# EAGLE board Sturingsschakeling_PCB_v3.1 (EAGLE 9.7.0)
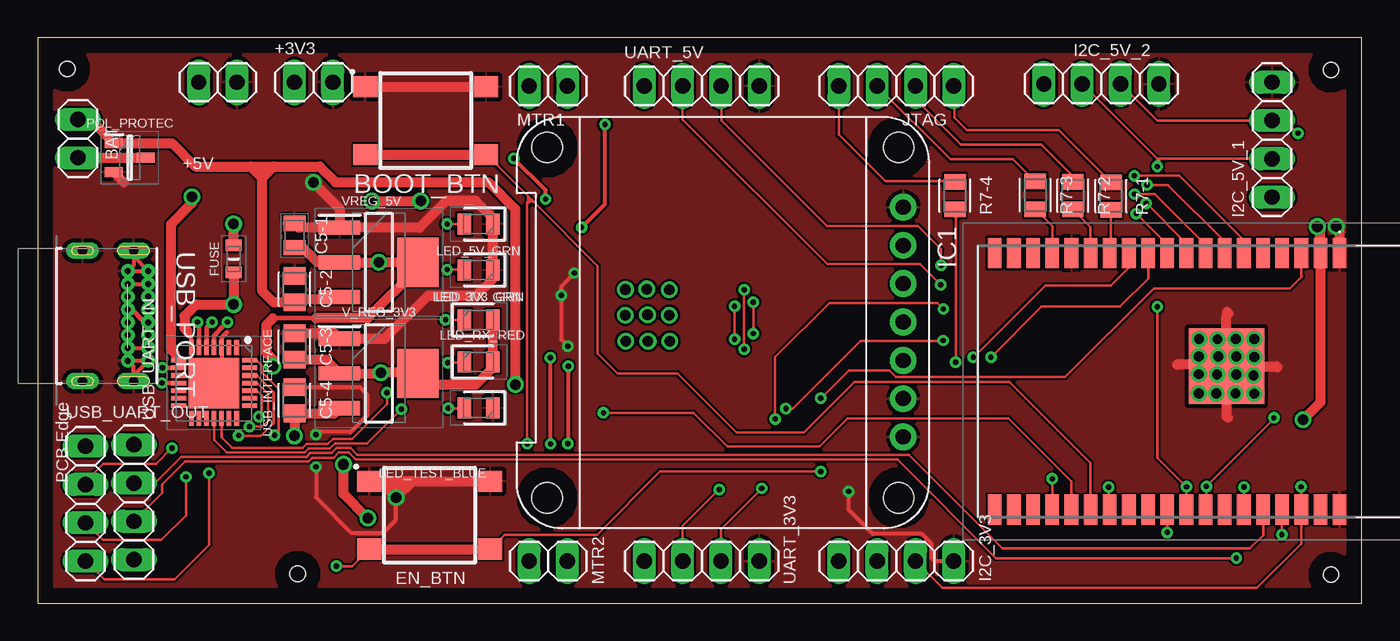
[diagram p0: board, top side]
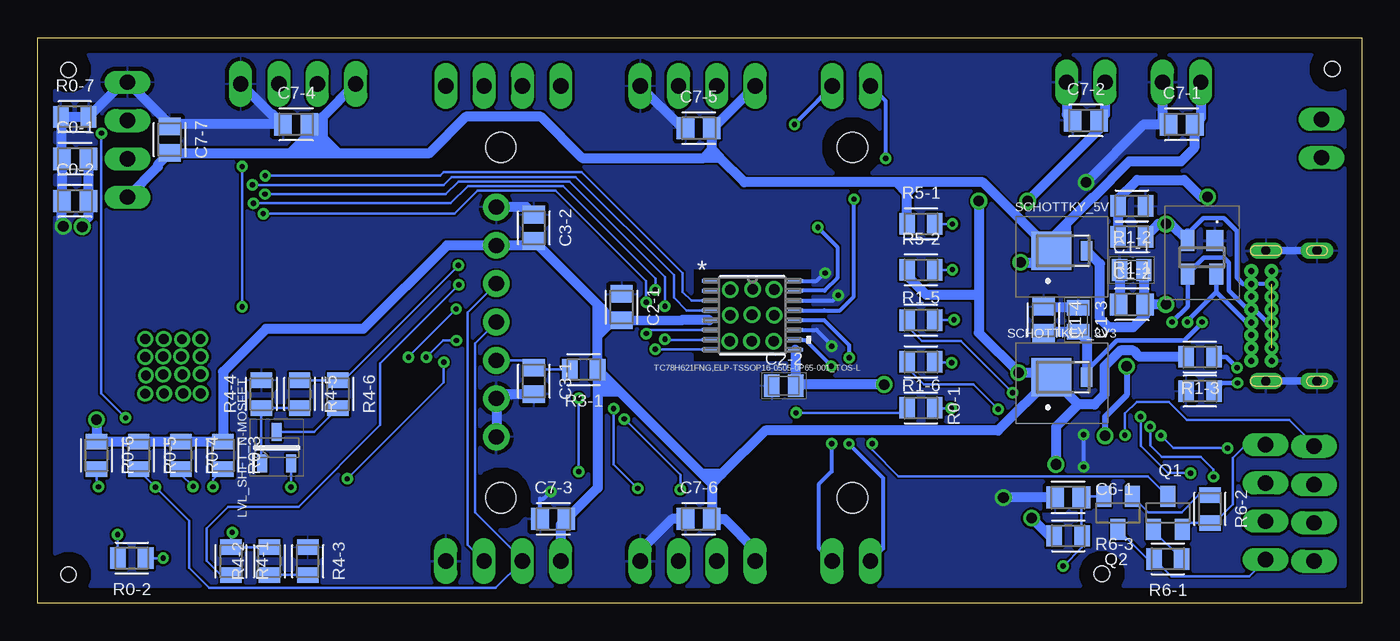
[diagram p1: board, bottom side, seen from below]

Size 87.74 x 37.5 mm. Coordinates in mm from the lower left corner, seen from the top.
Outline: 0,0 87.74,0 87.74,37.5 0,37.5 0,0
Copper layers (1*16): Top 0.035mm / dielectric 1.5mm / Bottom 0.035mm
Design rules "default": minimum track width 6mil, minimum drill 0.35mm, track to track 6mil, track to pad 6mil, pad to pad 6mil, via to via 6mil, smd to smd 6mil, copper to edge 40mil, drill to drill 6mil, minimum pad ring 10mil, minimum via ring 8mil, stop-mask expansion 4mil, vias tented up to drill 0mil, thermal gap 10mil
Holes 1 mm at 85.7,1.91 85.7,35.37 1.96,35.42 17.22,1.96

## Footprints (pad centres in the part's own frame; a part is rotated, then mirrored left to right if it is on the bottom)
1X02 = drill 1.016 long: 1 -1.27,0; 2 1.27,0
B3FS-1000P = smd 1.6 x 1.4: 1 4,-2.25; 2 -4,-2.25; 3 4,2.25; 4 -4,2.25
CAPC2012X110 = smd 1.165 x 1.465: 1 -0.875,0; 2 0.875,0
CAPC2012X145N = smd 1.02 x 1.47: 1 -0.8,0; 2 0.8,0
FUSC1608X100N = smd 0.77 x 1.07: 1 -0.9,0; 2 0.9,0
1X04 = drill 1.016 long: 1 -3.81,0; 2 -1.27,0; 3 1.27,0; 4 3.81,0
ESP32WROVER = smd 2 x 0.9: 1 -8.5,8.26; 2 -8.5,6.99; 3 -8.5,5.72; 4 -8.5,4.45; 5 -8.5,3.18; 6 -8.5,1.91; 7 -8.5,0.64; 8 -8.5,-0.63; 9 -8.5,-1.9; 10 -8.5,-3.17; 11 -8.5,-4.44; 12 -8.5,-5.71; 13 -8.5,-6.98; 14 -8.5,-8.25; 15 -8.5,-9.52; 16 -8.5,-10.79; 17 -8.5,-12.06; 18 -8.5,-13.33; 19 -8.5,-14.6; 20 8.5,-14.6; 21 8.5,-13.33; 22 8.5,-12.06; 23 8.5,-10.79; 24 8.5,-9.52; 25 8.5,-8.25; 26 8.5,-6.98; 27 8.5,-5.71; 28 8.5,-4.44; 29 8.5,-3.17; 30 8.5,-1.9; 31 8.5,-0.63; 32 8.5,0.64; 33 8.5,1.91; 34 8.5,3.18; 35 8.5,4.45; 36 8.5,5.72; 37 8.5,6.99; 38 8.5,8.26 | smd 5 x 5: 39 -1,0.76
LEDC2012X80N = smd 0.9 x 1.4: 1 -0.95,0; 2 0.95,0
SOT96P240X110-3N = smd 1.2 x 0.65: 1 -1.05,0.96; 2 -1.05,-0.96; 3 1.05,0
P-TSSOP16-0505-0P65-001_TOS-L = smd 1.006 x 0.23: 1 -2.849,2.275; 2 -2.849,1.625; 3 -2.849,0.975; 4 -2.849,0.325; 5 -2.849,-0.325; 6 -2.849,-0.975; 7 -2.849,-1.625; 8 -2.849,-2.275; 9 2.849,-2.275; 10 2.849,-1.625; 11 2.849,-0.975; 12 2.849,-0.325; 13 2.849,0.325; 14 2.849,0.975; 15 2.849,1.625; 16 2.849,2.275
OLED096_SPI/I2C = drill 1 pad 1.778: CS/GND 22.5,26.87; D0/SCL 12.34,26.87; D1/SDA 14.88,26.87; DC/GND 19.96,26.87; GND 7.26,26.87; RES/RST 17.42,26.87; VCC 9.8,26.87 | hole 2: 3.3,3.27; 26.54,3.27; 26.54,26.57; 3.3,26.57
SOT23-BEC = smd 1 x 1.4: B -0.95,-1.1; C 0,1.1; E 0.95,-1.1
RESC2012X65 = smd 1.031 x 1.42: 1 -0.919,0; 2 0.919,0
SS1P3LM384A = smd 2.67 x 2.54: 1 0,0 | smd 0.762 x 1.27: 2 2.351,0
SP0503BAHTG = smd 1.1 x 1.4: 1 -0.85,-1.1 | smd 0.9 x 1.4: 2 0.95,-1.1; 3 0.95,1.1; 4 -0.95,1.1
QFN50P500X500X80-29N = smd 1 x 0.3: 1 -2.35,1.5; 2 -2.35,1; 3 -2.35,0.5; 4 -2.35,0; 5 -2.35,-0.5; 6 -2.35,-1; 7 -2.35,-1.5; 15 2.35,-1.5; 16 2.35,-1; 17 2.35,-0.5; 18 2.35,0; 19 2.35,0.5; 20 2.35,1; 21 2.35,1.5 | smd 0.3 x 1: 8 -1.5,-2.35; 9 -1,-2.35; 10 -0.5,-2.35; 11 0,-2.35; 12 0.5,-2.35; 13 1,-2.35; 14 1.5,-2.35; 22 1.5,2.35; 23 1,2.35; 24 0.5,2.35; 25 0,2.35; 26 -0.5,2.35; 27 -1,2.35; 28 -1.5,2.35 | smd 3.35 x 3.35: 29 0,0
GCT_USB4085-GF-A_REVA4 = drill 0.4 pad 0.65: A1 -2.975,4.025; A4 -2.125,4.025; A5 -1.275,4.025; A6 -0.425,4.025; A7 0.425,4.025; A8 1.275,4.025; A9 2.125,4.025; A12 2.975,4.025; B1 2.975,2.675; B4 2.125,2.675; B5 1.275,2.675; B6 0.425,2.675; B7 -0.425,2.675; B8 -1.275,2.675; B9 -2.125,2.675; B12 -2.975,2.675 | drill 0.6 pad 1.108 long: P1 -4.325,3.045; P2 4.325,3.045; P3 4.325,-0.335; P4 -4.325,-0.335
SOT230P700X180-4N = smd 2.75 x 0.95: 1 -2.6,2.3; 2 -2.6,0; 3 -2.6,-2.3 | smd 2.75 x 3.25: 4 2.6,0

## Placement (x,y rotation side)
+3V3  PINHD-1X2  [1X02]  18.29,34.54 0 top
+5V  PINHD-1X2  [1X02]  11.94,34.54 0 top
BAT  PINHD-1X2  [1X02]  2.67,30.81 270 top
BOOT_BTN  B3FS-1000P  [B3FS-1000P]  25.72,32 180 top
C0-1  22uF  [CAPC2012X110]  85.27,29.46 0 bottom
C0-2  100nF  [CAPC2012X110]  85.27,26.67 0 bottom
C1-1  4.7uF_16V  [CAPC2012X145N]  15.24,22.1 0 bottom
C1-2  100nF  [CAPC2012X110]  15.24,19.81 0 bottom
C1-3  4.7uF_16V  [CAPC2012X145N]  18.8,18.8 270 bottom
C1-4  100nF  [CAPC2012X110]  21.08,18.8 270 bottom
C2-1  1uF  [CAPC2012X110]  49.05,19.63 270 bottom
C2-2  4.7uF_16V  [CAPC2012X145N]  38.3,14.43 0 bottom
C3-1  100nF  [CAPC2012X110]  54.86,14.73 270 bottom
C3-2  100nF  [CAPC2012X110]  54.86,24.89 270 bottom
C5-1  4.7uF_16V  [CAPC2012X145N]  17.02,24.38 270 top
C5-2  1uF  [CAPC2012X110]  17.02,20.83 270 top
C5-3  4.7uF  [CAPC2012X110]  17.02,17.02 270 top
C5-4  1uF  [CAPC2012X110]  17.02,13.46 270 top
C6-1  1uF  [CAPC2012X110]  19.46,7.01 0 bottom
C7-1  1uF  [CAPC2012X110]  11.94,31.75 0 bottom
C7-2  1uF  [CAPC2012X110]  18.29,32 0 bottom
C7-3  1uF  [CAPC2012X110]  53.58,5.59 0 bottom
C7-4  1uF  [CAPC2012X110]  70.61,31.75 0 bottom
C7-5  1uF  [CAPC2012X110]  43.94,31.5 0 bottom
C7-6  1uF  [CAPC2012X110]  43.94,5.59 0 bottom
C7-7  1uF  [CAPC2012X110]  78.99,30.73 270 bottom
EN_BTN  B3FS-1000P  [B3FS-1000P]  25.97,5.84 180 top
FUSE  MF-FSMF050X-2  [FUSC1608X100N]  12.98,22.83 90 top
I2C_3V3  PINHD-1X4  [1X04]  56.9,2.79 0 top
I2C_5V_1  PINHD-1X4  [1X04]  81.79,30.73 90 top
I2C_5V_2  PINHD-1X4  [1X04]  70.48,34.43 0 top
IC1  ESP32-WROVER  [ESP32WROVER]  78.02,14.71 270 top
JTAG  PINHD-1X4  [1X04]  56.9,34.29 180 top
LED_3V3_GRN  150080RS75000  [LEDC2012X80N]  29.21,22.1 180 top
LED_5V_GRN  150080RS75000  [LEDC2012X80N]  29.21,25.15 180 top
LED_RX_RED  150080RS75000  [LEDC2012X80N]  29.21,16 0 top
LED_TEST_BLUE  150080RS75000  [LEDC2012X80N]  29.21,12.95 180 top
LED_TX_GRN  150080RS75000  [LEDC2012X80N]  29.21,18.78 0 top
LVL_SHFT_N-MOSFET  DMG3414U  [SOT96P240X110-3N]  71.91,10.31 90 bottom
MTR1  PINHD-1X2  [1X02]  33.83,34.29 180 top
MTR2  PINHD-1X2  [1X02]  33.83,2.79 0 top
MTR_DRVR  TC78H621FNG,ELP-TSSOP16-0505-0P65-001_TOS-L  [P-TSSOP16-0505-0P65-001_TOS-L]  40.39,19.1 0 bottom
OLED  OLED096_SPI/I2C  [OLED096_SPI/I2C]  30.48,33.53 270 top
POL_PROTEC  DMG3414U  [SOT96P240X110-3N]  6.1,29.54 0 top
Q1  BC817-16SMD  [SOT23-BEC]  12.85,5.99 0 bottom
Q2  BC817-16SMD  [SOT23-BEC]  16.15,5.99 180 bottom
R0-1  1kΩ  [RESC2012X65]  29.21,12.95 180 bottom
R0-2  499Ω  [RESC2012X65]  81.51,3 180 bottom
R0-3  4k7Ω  [RESC2012X65]  75.46,9.8 270 bottom
R0-4  4k7Ω  [RESC2012X65]  78.26,9.8 270 bottom
R0-5  2k4Ω  [RESC2012X65]  81.05,9.8 270 bottom
R0-6  2k4Ω  [RESC2012X65]  83.85,9.8 270 bottom
R0-7  1kΩ  [RESC2012X65]  85.29,32.26 0 bottom
R1-1  22k1Ω  [RESC2012X65]  15.24,24.31 180 bottom
R1-2  47k5Ω  [RESC2012X65]  15.24,26.34 180 bottom
R1-3  1kΩ  [RESC2012X65]  10.72,16.33 180 bottom
R1-4  10kΩ  [RESC2012X65]  10.72,14.07 0 bottom
R1-5  1kΩ  [RESC2012X65]  29.21,18.78 180 bottom
R1-6  1kΩ  [RESC2012X65]  29.21,16 180 bottom
R3-1  10kΩ  [RESC2012X65]  51.56,15.49 180 bottom
R4-1  1kΩ  [RESC2012X65]  74.93,2.79 270 bottom
R4-2  1kΩ  [RESC2012X65]  72.39,2.79 90 bottom
R4-3  1kΩ  [RESC2012X65]  69.85,2.79 270 bottom
R4-4  10kΩ  [RESC2012X65]  72.92,13.87 90 bottom
R4-5  4k7Ω  [RESC2012X65]  70.38,13.87 270 bottom
R4-6  10kΩ  [RESC2012X65]  67.84,13.87 270 bottom
R5-1  1kΩ  [RESC2012X65]  29.21,25.15 0 bottom
R5-2  1kΩ  [RESC2012X65]  29.21,22.1 0 bottom
R6-1  10kΩ  [RESC2012X65]  12.85,2.95 180 bottom
R6-2  10kΩ  [RESC2012X65]  10.06,6.25 270 bottom
R6-3  10kΩ  [RESC2012X65]  19.46,4.47 180 bottom
R7-1  100Ω  [RESC2012X65]  71.12,27 270 top
R7-2  100Ω  [RESC2012X65]  68.6,27.03 270 top
R7-3  100Ω  [RESC2012X65]  66.1,27.05 270 top
R7-4  100Ω  [RESC2012X65]  60.78,27.03 270 top
SCHOTTKEY_3V3  SS1P3L-M3_84A  [SS1P3LM384A]  20.57,14.99 0 bottom
SCHOTTKY_5V  SS1P3L-M3_84A  [SS1P3LM384A]  20.57,23.37 0 bottom
TVS_DIODE_ESD_P  SP0503BAHTG  [SP0503BAHTG]  10.59,22.94 180 bottom
UART_3V3  PINHD-1X4  [1X04]  44.01,2.79 0 top
UART_5V  PINHD-1X4  [1X04]  44.01,34.29 0 top
USB_INTERFACE  CP2102N-A02-GQFN28R  [QFN50P500X500X80-29N]  11.68,14.61 270 top
USB_PORT  USB4085-GF-A_REVA4  [GCT_USB4085-GF-A_REVA4]  3.3,19.05 270 top
USB_UART_IN  PINHD-1X4  [1X04]  6.38,6.71 270 top
USB_UART_OUT  PINHD-1X4  [1X04]  3.17,6.6 90 top
V_REG_3V3  LDL1117S33R  [SOT230P700X180-4N]  22.61,15.24 0 top
VREG_5V  LDL1117S50R  [SOT230P700X180-4N]  22.61,22.61 0 top

## Library data of the parts
+3V3 +5V BAT I2C_3V3 I2C_5V_1 I2C_5V_2 JTAG MTR1 MTR2 UART_3V3 UART_5V USB_UART_IN USB_UART_OUT = Connector; CATEGORY: CONNECTOR; SUB-CATEGORY: PIN-HEADER
BOOT_BTN EN_BTN = B3FS-1000P; ARROW_PART_NUMBER: B3FS-1000P; ARROW_PRICE-STOCK: https://www.arrow.com/en/products/b3fs-1000p/omron?region=nac; DESCRIPTION: Switch Tact,6x6mm,flat act,gen purp,tape Plunger Tactile Switch, SPST-NO 0.05 A@ 24 V dc 0.5mm; HEIGHT: mm; MANUFACTURER_NAME: Omron Electronics; MANUFACTURER_PART_NUMBER: B3FS-1000P; MOUSER_PART_NUMBER: 653-B3FS-1000P; MOUSER_PRICE-STOCK: https://www.mouser.co.uk/ProductDetail/Omron-Electronics/B3FS-1000P?qs=ImaqFqjHA4k6odVF2%2FXWpQ%3D%3D
C0-1 C0-2 C1-2 C1-4 C2-1 C3-1 C3-2 C5-2-C5-4 C6-1 C7-1-C7-7 = Capacitor; CATEGORY: Capacitor
C1-1 C1-3 C2-2 C5-1 = CC0805ZKY5V7BB475; ARROW_PART_NUMBER: CC0805ZKY5V7BB475; ARROW_PRICE-STOCK: https://www.arrow.com/en/products/cc0805zky5v7bb475/yageo; DESCRIPTION: YAGEO - CC0805ZKY5V7BB475 - SMD Multilayer Ceramic Capacitor, 4.7 F, 16 V, 0805 [2012 Metric], +80%, -20%, Y5V, CC Series; HEIGHT: 1.45mm; MANUFACTURER_NAME: KEMET; MANUFACTURER_PART_NUMBER: CC0805ZKY5V7BB475; MOUSER_PART_NUMBER: 603-CC805ZKY5V7BB475; MOUSER_PRICE-STOCK: https://www.mouser.co.uk/ProductDetail/Yageo/CC0805ZKY5V7BB475?qs=7s%252B3O6pAiyA4wtTM471wUA%3D%3D
FUSE = MF-FSMF050X-2; ARROW_PART_NUMBER: MF-FSMF050X-2; ARROW_PRICE-STOCK: https://www.arrow.com/en/products/mf-fsmf050x-2/bourns?region=nac; DESCRIPTION: 0603 PTC Resettable Fuses, 6V, 500mA Bourns 0.5A Surface Mount Resettable Fuse, 6 V; HEIGHT: 1mm; MANUFACTURER_NAME: Bourns; MANUFACTURER_PART_NUMBER: MF-FSMF050X-2; MOUSER_PART_NUMBER: 652-MFFSMF050X-2; MOUSER_PRICE-STOCK: https://www.mouser.co.uk/ProductDetail/Bourns/MF-FSMF050X-2?qs=3QkGRBNOvbrZekaW8Gqm4A%3D%3D
IC1 = ESP32-WROVER; DESCRIPTION: WiFi Modules (802.11) SMD Module, ESP32-D0WDQ6, 64Mbits PSRAM, 32Mbits SPI flash, PCB Antenna; HEIGHT: 3mm; MANUFACTURER_NAME: Espressif Systems; MANUFACTURER_PART_NUMBER: ESP32-WROVER; MOUSER_PART_NUMBER: 356-ESP32-WROVER
LED_3V3_GRN LED_5V_GRN LED_RX_RED LED_TEST_BLUE LED_TX_GRN = 150080RS75000; DESCRIPTION: LED,Wurth Elektronik,150080RS75000 Wurth Elektronik 150080RS75000, WL-SMCW Series Red LED, 625 nm 2012 (0805) Clear, Rectangle Lens SMD package; HEIGHT: 0.8mm; MANUFACTURER_NAME: Wurth Elektronik; MANUFACTURER_PART_NUMBER: 150080RS75000; MOUSER_PART_NUMBER: 710-150080RS75000; MOUSER_PRICE-STOCK: https://www.mouser.co.uk/ProductDetail/Wurth-Elektronik/150080RS75000?qs=LlUlMxKIyB2jdCo7bnfgew%3D%3D
LVL_SHFT_N-MOSFET POL_PROTEC = DMG3414U; DESCRIPTION: DIODES INC. - DMG3414U - MOSFET, N CH, W DIODE, 20V, 4.2A, SOT23; HEIGHT: 1.1mm; MANUFACTURER_NAME: Diodes Inc.; MANUFACTURER_PART_NUMBER: DMG3414U; MOUSER_PART_NUMBER: N/A; MOUSER_PRICE-STOCK: https://www.mouser.co.uk/ProductDetail/Diodes-Incorporated/DMG3414U?qs=Ledwo0gu0jiKJ4xsXSUnyQ%3D%3D
MTR_DRVR = TC78H621FNG-EL; COPYRIGHT: Copyright (C) 2022 Ultra Librarian. All rights reserved.; MANUFACTURER_PART_NUMBER: TC78H621FNG,EL; MFR_NAME: Toshiba Electronic Devices & Storage Co.
OLED = OLED096
Q1 Q2 = transistor-npn
R0-1-R0-7 R1-1-R1-6 R3-1 R4-1-R4-6 R5-1 R5-2 R6-1-R6-3 R7-1-R7-4 = Resistor; CATEGORY: Resistor; SUB-CATEGORY: Fixed
SCHOTTKEY_3V3 SCHOTTKY_5V = SS1P3L-M3_84A; ARROW_PART_NUMBER: SS1P3L-M3/84A; ARROW_PRICE-STOCK: https://www.arrow.com/en/products/ss1p3l-m384a/vishay?region=nac; DESCRIPTION: Schottky Diodes & Rectifiers 30volt 1.0amp Low VF High Current Density Surface Mount Schottky Barrier Rectifiers; HEIGHT: 1.15mm; MANUFACTURER_NAME: Vishay; MANUFACTURER_PART_NUMBER: SS1P3L-M3/84A; MOUSER_PART_NUMBER: 625-SS1P3L-M3/84A; MOUSER_PRICE-STOCK: https://www.mouser.co.uk/ProductDetail/Vishay-General-Semiconductor/SS1P3L-M3-84A?qs=HSPD0Bff7iZtYrbeCvAZDQ%3D%3D
TVS_DIODE_ESD_P = SP0503BAHTG; ARROW_PART_NUMBER: SP0503BAHTG; ARROW_PRICE-STOCK: https://www.arrow.com/en/products/sp0503bahtg/littelfuse?region=europe; DESCRIPTION: ESD Suppressors / TVS Diodes TVS AVAL DIODE SMT; HEIGHT: 1.22mm; MANUFACTURER_NAME: LITTELFUSE; MANUFACTURER_PART_NUMBER: SP0503BAHTG; MOUSER_PART_NUMBER: 576-SP0503BAHTG; MOUSER_PRICE-STOCK: https://www.mouser.co.uk/ProductDetail/Littelfuse/SP0503BAHTG?qs=uD%2FdkN7XIa0NTYXwHdELYA%3D%3D
USB_INTERFACE = CP2102N-A02-GQFN28R; ARROW_PART_NUMBER: CP2102N-A02-GQFN28R; ARROW_PRICE-STOCK: https://www.arrow.com/en/products/cp2102n-a02-gqfn28r/silicon-labs?region=nac; DESCRIPTION: USB Interface IC USB to UART bridge - QFN28; HEIGHT: 0.8mm; MANUFACTURER_NAME: Silicon Labs; MANUFACTURER_PART_NUMBER: CP2102N-A02-GQFN28R; MOUSER_PART_NUMBER: 634-CP2102NA02QFN28R; MOUSER_PRICE-STOCK: https://www.mouser.co.uk/ProductDetail/Silicon-Labs/CP2102N-A02-GQFN28R?qs=u16ybLDytRag4qKvSH3fTw%3D%3D
USB_PORT = USB-C; MANUFACTURER: Global Connector Technology; MAXIMUM_PACKAGE_HEIGHT: 3.46mm; PARTREV: A4; STANDARD: Manufacturer Recommendations
V_REG_3V3 = LDL1117S33R; ARROW_PART_NUMBER: LDL1117S33R; ARROW_PRICE-STOCK: https://www.arrow.com/en/products/ldl1117s33r/stmicroelectronics?region=nac; DESCRIPTION: STMICROELECTRONICS - LDL1117S33R - LDO, FIXED, 3.3V, 1.2A, SOT-223-3; HEIGHT: 1.8mm; MANUFACTURER_NAME: STMicroelectronics; MANUFACTURER_PART_NUMBER: LDL1117S33R; MOUSER_PART_NUMBER: 511-LDL1117S33R; MOUSER_PRICE-STOCK: https://www.mouser.co.uk/ProductDetail/STMicroelectronics/LDL1117S33R?qs=AQlKX63v8Rt9Bf6AWSrbFg%3D%3D
VREG_5V = LDL1117S50R; ARROW_PART_NUMBER: LDL1117S50R; ARROW_PRICE-STOCK: https://www.arrow.com/en/products/ldl1117s50r/stmicroelectronics?region=nac; DESCRIPTION: STMICROELECTRONICS - LDL1117S50R - LDO, FIXED, 5V, 1.2A, SOT-223-3; HEIGHT: 1.8mm; MANUFACTURER_NAME: STMicroelectronics; MANUFACTURER_PART_NUMBER: LDL1117S50R; MOUSER_PART_NUMBER: 511-LDL1117S50R; MOUSER_PRICE-STOCK: https://www.mouser.co.uk/ProductDetail/STMicroelectronics/LDL1117S50R?qs=AQlKX63v8RsuN9BQFiVf%2Fg%3D%3D

## Nets
3V3_USB: C1-3.2 C1-4.2 SCHOTTKEY_3V3.2 USB_INTERFACE.6
5V_OUT: LVL_SHFT_N-MOSFET.3 R4-6.2
5V_USB: C1-1.2 C1-2.2 FUSE.1 SCHOTTKY_5V.2 USB_INTERFACE.7
+3.3V: +3V3.1 C0-1.2 C0-2.2 C2-1.2 C3-2.2 C5-3.2 C7-2.2 C7-3.2 C7-6.2 I2C_3V3.1 IC1.2 LED_RX_RED.2 LED_TX_GRN.2 MTR_DRVR.5 OLED.VCC R0-3.1 R0-4.1 R0-5.1 R0-6.1 R1-3.2 R3-1.1 R5-2.1 R6-3.2 SCHOTTKEY_3V3.1 UART_3V3.1 V_REG_3V3.2 V_REG_3V3.4
+5V: +5V.1 C5-1.2 C5-4.2 C7-1.2 C7-4.2 C7-5.2 C7-7.2 I2C_5V_1.1 I2C_5V_2.1 R5-1.1 SCHOTTKY_5V.1 UART_5V.1 V_REG_3V3.3 VREG_5V.2 VREG_5V.4
BOOT: BOOT_BTN.3 BOOT_BTN.4 IC1.25 Q1.C
D+: TVS_DIODE_ESD_P.3 USB_INTERFACE.4 USB_PORT.A6 USB_PORT.B6
D-: TVS_DIODE_ESD_P.4 USB_INTERFACE.5 USB_PORT.A7 USB_PORT.B7
DTR_IN: Q1.E R6-2.2 USB_UART_IN.1
DTR_OUT: USB_INTERFACE.28 USB_UART_OUT.4
EN: C6-1.2 EN_BTN.3 EN_BTN.4 IC1.3 Q2.E R6-3.1
GND: +3V3.2 +5V.2 BOOT_BTN.1 BOOT_BTN.2 C0-1.1 C0-2.1 C1-1.1 C1-2.1 C1-3.1 C1-4.1 C2-1.1 C2-2.1 C3-1.2 C3-2.1 C5-1.1 C5-2.1 C5-3.1 C5-4.1 C6-1.1 C7-1.1 C7-2.1 C7-3.1 C7-4.1 C7-5.1 C7-6.1 C7-7.1 EN_BTN.1 EN_BTN.2 I2C_3V3.4 I2C_5V_1.4 I2C_5V_2.4 IC1.1 IC1.15 IC1.38 IC1.39 LED_3V3_GRN.1 LED_5V_GRN.1 LED_TEST_BLUE.1 MTR_DRVR.11 MTR_DRVR.14 MTR_DRVR.16 OLED.CS/GND OLED.DC/GND OLED.GND POL_PROTEC.2 R0-7.1 R0-7.2 R1-2.1 R1-4.1 R4-3.1 R4-4.2 TVS_DIODE_ESD_P.1 UART_3V3.4 UART_5V.4 USB_INTERFACE.3 USB_INTERFACE.29 USB_PORT.A1 USB_PORT.A12 USB_PORT.B1 USB_PORT.B12 USB_PORT.P1 USB_PORT.P2 USB_PORT.P3 USB_PORT.P4 V_REG_3V3.1 VREG_5V.1
GND_BAT: BAT.2 POL_PROTEC.3
LED_RX: R1-6.2 USB_INTERFACE.18
LED_TEST: IC1.24 R0-1.2
LED_TX: R1-5.2 USB_INTERFACE.19
MTCK: IC1.16 R7-3.2
MTDI: IC1.14 R7-2.2
MTDO: IC1.23 R7-4.2
MTMS: IC1.13 R7-1.2
MTR1_EN: IC1.7 MTR_DRVR.4
MTR1_OUT1: MTR1.1 MTR_DRVR.15
MTR1_OUT2: MTR1.2 MTR_DRVR.13
MTR1_PHA: IC1.6 MTR_DRVR.3
MTR2_EN: IC1.9 MTR_DRVR.8
MTR2_OUT1: MTR2.1 MTR_DRVR.12
MTR2_OUT2: MTR2.2 MTR_DRVR.10
MTR2_PHA: IC1.8 MTR_DRVR.7
MTR_STBY: IC1.10 MTR_DRVR.6
N$6: JTAG.1 R7-1.1
N$7: LED_3V3_GRN.2 R5-2.2
N$8: LED_5V_GRN.2 R5-1.2
N$10: LED_TEST_BLUE.2 R0-1.1
N$11: JTAG.2 R7-2.1
N$14: JTAG.3 R7-3.1
N$15: JTAG.4 R7-4.1
N$18: Q1.B R6-1.1
N$19: Q2.B R6-2.1
N$34: LVL_SHFT_N-MOSFET.1 R4-4.1 R4-5.2
N$35: R4-2.1 R4-3.2
N$38: IC1.35 R0-2.2
N$40: LED_TX_GRN.1 R1-5.1
N$41: LED_RX_RED.1 R1-6.1
RES: C3-1.1 OLED.RES/RST R3-1.2
RSTB: R1-3.1 USB_INTERFACE.9
RTS_IN: Q2.C R6-1.2 USB_UART_IN.4
RTS_OUT: USB_INTERFACE.24 USB_UART_OUT.1
RX_3V3: IC1.11 UART_3V3.2
RX_5V_A: IC1.26 LVL_SHFT_N-MOSFET.2
RX_5V_B: R4-1.2 UART_5V.2
RX_USB: USB_INTERFACE.26 USB_UART_OUT.3
RX_USB_IN: IC1.34 USB_UART_IN.2
SCL_3V3: I2C_3V3.3 IC1.36 OLED.D0/SCL R0-6.2
SCL_5V: I2C_5V_1.3 I2C_5V_2.3 IC1.31 R0-4.2
SDA_3V3: I2C_3V3.2 IC1.33 OLED.D1/SDA R0-5.2
SDA_5V: I2C_5V_1.2 I2C_5V_2.2 IC1.30 R0-3.2
SUSPENDB: R1-4.2 USB_INTERFACE.11
TX_3V3: IC1.12 UART_3V3.3
TX_5V_A: IC1.29 R4-1.1 R4-2.2
TX_5V_B: R4-5.1 R4-6.1 UART_5V.3
TX_USB: USB_INTERFACE.25 USB_UART_OUT.2
TX_USB_IN: R0-2.1 USB_UART_IN.3
V_BAT: BAT.1 C2-2.2 C5-2.2 MTR_DRVR.9 POL_PROTEC.1 VREG_5V.3
VBUS_INT: R1-1.2 R1-2.2 USB_INTERFACE.8
VBUS_USB: FUSE.2 R1-1.1 TVS_DIODE_ESD_P.2 USB_PORT.A4 USB_PORT.A9 USB_PORT.B4 USB_PORT.B9

## Tracks (layer width: path | path; a pad name or v marks a point on that pad's centre or on a via)
3V3_USB  (via drill 0.35)
  Top 0.305: USB_INTERFACE.6 10.68,18.55 v10.59,18.64
  Bottom 0.305: v10.59,18.64 10.59,18.59 11.76,17.42 16.24,17.42 18.22,15.44 SCHOTTKEY_3V3.2
  Bottom 0.66: SCHOTTKEY_3V3.2 18.22,17.42 C1-3.2 21.01,18 C1-4.2
5V_OUT
  Bottom 0.152: R4-6.2 69.43,11.36 LVL_SHFT_N-MOSFET.3
5V_USB  (via drill 0.7)
  Top 0.152: FUSE.1 13.03,21.88
  Top 0.305: USB_INTERFACE.7 10.18,17.65 9.93,17.91 9.93,18.03
  Top 0.66: FUSE.1 v12.98,19.81 10.49,19.81 9.73,19.05 9.73,18.24 9.93,18.03
  Bottom 0.152: C1-1.2 14.44,19.89 | 14.44,19.89 14.44,19.68 14.44,19.34 | 14.44,19.89 C1-2.2 14.34,19.84
  Bottom 0.66: C1-1.2 14.44,19.68 14.31,19.81 v12.98,19.81 | C1-2.2 14.37,19.09 15.16,18.29 16.76,18.29 17.35,18.87 17.35,22.49 SCHOTTKY_5V.2
+3.3V  (via drill 0.7)
  Top 0.152: 24.95,14.99 25.04,15.07
  Top 0.66: v83.84,12.17 85.01,13.33 IC1.2 85.01,24.76 v84.79,24.97 | C5-3.2 19.1,16.14 V_REG_3V3.2 22.68,15.24 v22.73,15.29 25.16,15.29 V_REG_3V3.4 | V_REG_3V3.4 25.04,15.07 | v22.15,26.67 v25.38,26.67 | V_REG_3V3.4 25.97,14.48 29.01,14.48 30.16,15.63 LED_RX_RED.2 LED_TX_GRN.2 | v21.87,5.64 20.27,7.24 v20.27,9.21
  Bottom 0.152: 20.32,13.97 20.57,14.22 SCHOTTKEY_3V3.1 | C7-3.2 52.77,5.52 53.09,5.2
  Bottom 0.66: C0-1.2 C0-2.2 84.39,25.59 84.79,25.19 v84.79,24.97 | MTR_DRVR.5 45.07,18.77 45.08,18.77 C2-1.2 | v83.84,12.17 R0-6.1 R0-5.1 R0-4.1 R0-3.1 75.46,15.34 72.62,18.19 66.17,18.19 60.63,23.73 OLED.VCC 55.15,23.73 C3-2.2 50.64,19.8 | R3-1.1 50.64,17.72 | 50.64,17.72 50.64,18.77 | 50.64,18.77 50.64,19.8 | C2-1.2 49.61,18.76 | 49.61,18.76 50.64,19.8 | 50.64,17.72 49.61,18.76 | C2-1.2 50.63,18.76 50.64,18.77 | R3-1.1 50.64,14.02 | 50.64,14.02 50.64,7.65 52.77,5.52 | R3-1.1 49.74,14.6 | 49.74,14.6 49.17,14.02 | 49.17,14.02 43.71,8.56 | 43.71,8.56 43.07,7.92 | 43.07,7.92 C7-6.2 42.23,5.59 40.2,3.56 UART_3V3.1 | 49.74,14.6 50.07,14.6 50.64,14.02 | 49.17,14.02 50.64,14.02 | C7-3.2 53.09,5.2 I2C_3V3.1 | +3V3.1 17.02,32.4 C7-2.2 17.41,31.41 v22.15,26.67 | SCHOTTKEY_3V3.1 24.11,11.46 39.53,11.46 42.42,8.56 | 42.42,8.56 43.07,7.92 | 42.42,8.56 43.71,8.56 | SCHOTTKEY_3V3.1 20.88,15.29 v22.73,15.29 25.38,17.93 25.38,20.37 | v25.38,26.67 25.38,20.37 | 25.38,20.37 25.45,20.45 28.85,20.45 30.13,21.72 R5-2.1 | 18.77,13.18 SCHOTTKEY_3V3.1 | 18.77,13.18 17.72,13.18 17.05,13.85 17.05,15.71 16.01,16.76 15.15,16.76 14.72,16.33 R1-3.2 | 18.77,13.18 20.27,11.68 v20.27,9.21 | v21.87,5.64 20.7,4.47 R6-3.2
+5V  (via drill 0.7)
  Top 0.305: 18.44,18.9 15.6,18.9
  Top 0.66: C5-1.2 17.56,23.58 18.54,22.61 VREG_5V.2 v22.61,22.61 VREG_5V.4 25.21,22.23 21.87,18.9 18.44,18.9 | V_REG_3V3.3 19.65,12.59 C5-4.2 v17.02,11.1 | v15.58,15.72 15.58,16.2 15.14,16.64 15.14,18.44 15.6,18.9
  Bottom 0.152: v22.61,22.61 20.83,22.61
  Bottom 0.406: v15.58,15.72 15.58,13.81 17.02,12.37 v17.02,11.1
  Bottom 0.66: I2C_5V_1.1 81.79,26.94 79.78,28.95 79.78,29.07 C7-7.2 71.02,29.86 | C7-4.2 69.36,31.75 | 69.36,31.75 69.13,31.75 71.02,29.86 | 69.36,31.75 68.87,32.24 | 68.87,32.24 I2C_5V_2.1 | C7-4.2 68.87,30.88 | 68.87,30.88 67.84,29.86 | 67.84,29.86 61.77,29.86 59.37,32.26 54.39,32.26 51.66,29.53 43.6,29.53 | 43.07,30.06 43.6,29.53 | 43.07,30.06 C7-5.2 42.99,31.5 UART_5V.1 | 71.02,29.86 70.51,29.86 | 70.51,29.86 69.65,29.86 | 69.65,29.86 68.73,29.86 | 68.73,29.86 67.84,29.86 | C7-4.2 69.74,30.86 68.73,29.86 | C7-4.2 69.74,30.63 70.51,29.86 | C7-4.2 69.74,29.95 69.65,29.86 | 68.87,32.24 68.87,30.88 | +5V.1 10.67,32.15 C7-1.2 11.1,31.71 11.1,30.18 11.99,29.29 15.43,29.29 17.83,26.88 17.88,26.88 19.57,25.18 | SCHOTTKY_5V.1 21.48,24.27 | 21.48,24.27 25.12,27.91 29.41,27.91 | 29.41,27.91 30.85,27.91 | 30.85,27.91 40.92,27.91 42.53,29.53 | 42.53,29.53 43.07,30.06 | 42.53,29.53 43.6,29.53 | v22.61,22.61 21.34,22.61 SCHOTTKY_5V.1 | SCHOTTKY_5V.1 19.57,24.37 19.57,25.18 | 19.57,25.18 20.48,24.27 21.48,24.27 | R5-1.1 30.13,27.2 | 30.13,27.2 29.41,27.91 | 30.13,27.2 30.85,27.91
BOOT  (via drill 0.35)
  Top 0.152: IC1.25 69.77,9.3 64.39,14.69 54.13,14.69 50.77,11.33 46.29,11.33 42.39,15.23 38.44,15.23 37.1,16.57 37.1,22.37 32.81,26.66 | 32.81,26.66 32.72,26.75 | 32.72,26.75 32.49,26.98 | 32.49,26.98 29.9,29.57 | v32.44,10.59 32.44,26.57 32.49,26.57 | 32.49,26.57 32.49,26.64 | 32.49,26.98 32.49,26.64 | 32.49,26.64 32.59,26.75 32.72,26.75 | 32.72,26.75 32.54,26.57 32.49,26.57 | 32.49,26.64 32.79,26.64 32.81,26.66
  Top 0.66: BOOT_BTN.3 BOOT_BTN.4 29.9,29.57
  Bottom 0.152: v32.44,10.59 32.44,10.16 30.7,8.43 14.19,8.43 Q1.C
D+  (via drill 0.35)
  Top 0.305: v12.57,18.64 12.34,18.41 12.33,18.41 11.68,17.77 USB_INTERFACE.4
  Bottom 0.305: v12.57,18.64 11.54,19.68 TVS_DIODE_ESD_P.3 10.47,22.91 9.13,22.91 8.81,22.59 8.81,20.74 7.64,19.57 7.42,19.57 USB_PORT.A6 7.24,19.38 7.01,19.38 6.25,18.62 USB_PORT.B6
D-  (via drill 0.35)
  Top 0.305: USB_INTERFACE.5 11.18,18.27 v11.56,18.64 | USB_PORT.A7 7.1,18.62 6.57,19.16 6.25,19.48 USB_PORT.B7
  Bottom 0.305: v11.56,18.64 11.56,18.72 9.64,20.64 | 9.64,20.64 TVS_DIODE_ESD_P.4 | USB_PORT.A7 7.63,18.62 9.64,20.64
DTR_IN
  Bottom 0.152: USB_UART_IN.1 7.67,10.52 8.53,9.65 8.53,6.55 9.76,5.33 R6-2.2 11.47,5.33 Q1.E
DTR_OUT  (via drill 0.35)
  Top 0.152: v15.7,11.15 15.98,11.43 15.98,14.2 14.8,15.38 14.8,15.81 14.51,16.11 USB_INTERFACE.28
  Bottom 0.152: v15.7,11.15 15.7,12.57 14.91,13.36 12.8,13.36 11.61,12.17 4.8,12.17 3.17,10.54 USB_UART_OUT.4
EN  (via drill 0.35)
  Top 0.152: v19.79,2.46 20.84,2.46 EN_BTN.3 | EN_BTN.4 30.93,4.55 37.06,4.55 41.25,8.74 v51.89,8.74 | IC1.3 83.74,21.7 83.77,21.67 82.98,20.88 73.97,20.88 68.08,14.99 56.89,14.99 56.43,15.44 53.75,15.44 v51.89,13.59
  Top 0.66: EN_BTN.3 EN_BTN.4
  Bottom 0.152: Q2.E 18.5,7.09 C6-1.2 18.58,4.51 R6-3.1 18.54,3.71 v19.79,2.46 | v51.89,8.74 v51.89,13.59
GND  (via drill 0.35, 0.7)
  Top 0.254: v35.13,17.04 34.7,17.48 v34.7,20.42 34.7,21.03 v35.56,21.89 | C5-4.1 21.34,14.34 21.82,13.86 21.82,12.45 20.73,11.35 | 20.73,11.35 20.7,11.33 | 20.73,11.35 18.67,11.35 18.47,11.15 18.46,11.15 v18.44,11.17 | USB_INTERFACE.3 12.18,15.11 USB_INTERFACE.29 | v18.44,9.04 18.44,7.01 20.78,4.67 22.89,4.67 23.75,5.54 v23.75,7.01 | I2C_3V3.4 59.54,2.79 59.49,2.74 59.21,3.02 59.21,3.99 58.6,4.6 55.35,4.6 53.75,6.2 v53.75,7.42 | USB_PORT.B12 USB_PORT.A1 6.35,23 USB_PORT.P1 6.35,22.39 USB_PORT.B12 | USB_PORT.A12 USB_PORT.B1 6.35,15.71 USB_PORT.P2 6.35,15.1 USB_PORT.A12
  Top 0.305: USB_INTERFACE.3 12.18,17.62 12.52,17.96
  Top 0.66: 24.83,8.09 23.75,8.09 | 23.75,8.09 23.37,8.09 | 23.37,8.09 EN_BTN.1 22.67,8.09 v23.75,7.01 | 24.83,8.09 EN_BTN.2 | BOOT_BTN.1 BOOT_BTN.2 | POL_PROTEC.2 5.71,27.91 | v18.26,27.91 20.01,26.17 VREG_5V.1 | VREG_5V.1 17.3,24.91 C5-1.1 | C5-3.1 19.65,17.89 V_REG_3V3.1 23,17.54 25.86,20.4 29.06,20.4 30.16,21.5 LED_3V3_GRN.1 LED_5V_GRN.1 30.16,25.54 29.03,26.67 27.08,26.67 25.31,24.91 VREG_5V.1 | IC1.1 86.28,24.77 v86.05,24.99 | IC1.39 78.78,19.06 78.92,19.2 78.8,19.32 | IC1.39 82.1,15.71 82.17,15.65 | IC1.39 78.78,12.38 78.87,12.29 | IC1.39 78.67,15.82 75.49,15.82 | v23.75,7.01 24.83,8.09 | v23.75,7.01 23.75,8.09 | v23.75,7.01 23.75,7.71 23.37,8.09
  Bottom 0.152: 36.12,21.36 36.13,21.37 | 36.13,18.12 36.12,18.11
  Bottom 0.254: MTR_DRVR.11 36.13,18.12 35.13,17.12 v35.13,17.04 | MTR_DRVR.14 36.15,20.07 | 36.14,20.07 36.15,20.07 | MTR_DRVR.16 36.13,21.37 35.6,21.89 v35.56,21.89 | 36.15,20.07 35.05,20.07 v34.7,20.42 | v18.44,11.17 v18.44,9.04 | v53.75,7.42 54.23,6.93 54.48,6.93 54.48,5.62 C7-3.1
  Bottom 0.508: USB_PORT.P4 USB_PORT.P1 | USB_PORT.P3 USB_PORT.P2
  Bottom 0.66: I2C_5V_2.4 74.28,34.43 72.27,32.42 72.16,32.42 C7-4.1 78.85,31.75 C7-7.1 78.99,31.75 I2C_5V_1.4 82.08,34.54 R0-7.2 R0-7.1 86.14,32.19 C0-1.1 C0-2.1 86.14,25.08 v86.05,24.99 | C3-1.2 57.06,13.86 OLED.DC/GND OLED.CS/GND | C3-2.1 55.37,26.27 OLED.GND | C7-5.1 45.02,31.5 UART_5V.4 | C7-6.1 45.71,5.59 47.82,3.48 UART_3V3.4 | +5V.2 13.21,32.15 C7-1.1 14.43,31.75 v18.26,27.91 | +3V3.2 19.56,32.4 C7-2.1 | C1-3.1 21.01,19.6 C1-4.1 | C1-1.1 16.04,19.89 C1-2.1 | C6-1.1 v23.75,7.01
  pour Top: -0.86,38.3 -0.86,-0.84 -0.76,-0.94 88.85,-0.94 88.85,38.63 -0.53,38.63
  pour Bottom: -0.79,38.46 -0.79,-0.69 -0.89,-0.79 88.77,-0.79 88.82,-0.74 88.82,38.61 88.8,38.63 -0.58,38.63 -0.76,38.46
GND_BAT
  Top 0.66: BAT.2 POL_PROTEC.3
LED_RX  (via drill 0.35)
  Top 0.152: USB_INTERFACE.18 11.68,10.85 12.52,10.01 17.69,10.01 17.94,10.26 19.35,10.26 19.69,10.6 21.83,10.6 v24.11,12.88
  Bottom 0.152: R1-6.2 30.13,15.63 29.01,14.5 25.73,14.5 v24.11,12.88
LED_TEST  (via drill 0.35)
  Top 0.152: IC1.24 68.5,8.09 64.34,12.24 53.67,12.24 51.82,10.39 45.7,10.39 43.46,12.62 v37.49,12.62
  Bottom 0.152: v37.49,12.62 30.46,12.62 R0-1.2
LED_TX  (via drill 0.35)
  Top 0.152: USB_INTERFACE.19 12.18,11.01 12.87,10.32 17.57,10.32 17.81,10.56 19.22,10.56 19.57,10.91 20.82,10.91 23.14,13.23 v23.14,13.97
  Bottom 0.152: R1-5.2 30.13,18.37 29.16,17.4 26.57,17.4 v23.14,13.97
MTCK
  Top 0.152: R7-3.2 67.23,25.01 IC1.16
MTDI
  Top 0.152: R7-2.2 69.77,24.94 IC1.14
MTDO  (via drill 0.35)
  Top 0.152: 67.23,7.6 67.23,7.59 | 67.23,7.59 IC1.23 | R7-4.2 60.83,26.05 v60.83,15.97 | v67.23,8.26 67.23,7.6 67.23,7.59
  Bottom 0.152: v67.23,8.26 60.83,14.66 v60.83,15.97
MTMS
  Top 0.152: R7-1.2 71.12,23.3 IC1.13
MTR1_EN  (via drill 0.35)
  Top 0.152: IC1.7 78.66,23.98 74.91,27.74 v73.51,27.74
  Bottom 0.152: MTR_DRVR.4 44.74,19.42 45.59,20.27 45.59,21.77 52.09,28.27 60.33,28.27 60.86,27.74 v73.51,27.74
MTR1_OUT1  (via drill 0.35)
  Top 0.254: v36.04,24.92 37.59,26.47 v37.59,31.75
  Bottom 0.152: 35.59,20.73 35.59,20.72
  Bottom 0.254: 36.04,33.35 MTR1.1 35.1,34.24 v37.59,31.75 | v36.04,24.92 34.75,23.62 34.75,21.57 35.59,20.72 MTR_DRVR.15
MTR1_OUT2  (via drill 0.35)
  Top 0.254: v33.66,26.8 33.66,27.38 v31.55,29.49
  Bottom 0.152: 35.61,19.41 35.63,19.42
  Bottom 0.254: MTR_DRVR.13 35.63,19.42 34.58,19.42 33.66,20.34 v33.66,26.8 | v31.55,29.49 31.55,33.27 MTR1.2
MTR1_PHA  (via drill 0.35)
  Top 0.152: IC1.6 79.93,24.09 75.67,28.35 v72.67,28.35
  Bottom 0.152: MTR_DRVR.3 44.43,20.07 45.01,20.65 45.01,21.89 51.69,28.57 60.86,28.57 61.09,28.35 v72.67,28.35
MTR2_EN  (via drill 0.35)
  Top 0.152: IC1.9 76.12,23.86 v73.46,26.52 | v46.81,20.78 v46.81,16.84
  Bottom 0.152: 44.11,16.82 MTR_DRVR.8 43.26,16.84 v46.81,16.84 | v73.46,26.52 60.38,26.52 59.23,27.66 52.93,27.66 46.81,21.54 v46.81,20.78
MTR2_OUT1  (via drill 0.35)
  Top 0.254: v33.96,16.28 33.96,10.57 v33.98,10.57
  Bottom 0.152: 35.64,18.77
  Bottom 0.254: MTR_DRVR.12 35.64,18.77 33.96,17.09 v33.96,16.28 | v33.98,10.57 31.73,8.31 31.73,3.63 MTR2.1
MTR2_OUT2  (via drill 0.35)
  Top 0.254: v35.15,15.72 35.15,10.62 v35.13,10.59
  Bottom 0.254: MTR_DRVR.10 37.52,17.45 36.85,17.45 35.15,15.75 v35.15,15.72 | 35.64,3.33 MTR2.2 35.99,3.68 35.99,7.87 35.13,8.74 v35.13,10.59
MTR2_PHA  (via drill 0.35)
  Top 0.152: IC1.8 77.39,23.78 74.04,27.13 v72.69,27.13 | v46.18,19.68 v46.18,17.5
  Bottom 0.152: 44.53,17.47 MTR_DRVR.7 46.15,17.47 v46.18,17.5 | v72.69,27.13 60.71,27.13 59.87,27.96 52.5,27.96 46.18,21.64 v46.18,19.68
MTR_STBY  (via drill 0.35)
  Top 0.152: IC1.10 74.85,23.78 v72.8,25.83 | v47.42,19.96 v47.42,17.88
  Bottom 0.152: MTR_DRVR.6 47.21,18.12 47.42,17.91 v47.42,17.88 | v72.8,25.83 60.12,25.83 58.6,27.36 53.42,27.36 47.42,21.36 v47.42,19.96
N$2  (via drill 0.65)
  other vias: 76.96,17.53
N$3  (via drill 0.7)
  other vias: 38.95,20.8
N$6
  Top 0.152: JTAG.1 60.76,34.24 60.76,32.18 61.57,31.37 67.67,31.37 R7-1.1
N$7  (via drill 0.35)
  Top 0.152: v27.13,22.12 28.23,22.12 LED_3V3_GRN.2
  Bottom 0.152: R5-2.2 27.15,22.1 v27.13,22.12
N$8  (via drill 0.35)
  Top 0.152: LED_5V_GRN.2 v27.13,25.15
  Bottom 0.152: v27.13,25.15 R5-1.2
N$9  (via drill 0.65)
  other vias: 78.18,17.5
N$10  (via drill 0.35)
  Top 0.152: LED_TEST_BLUE.2 28.23,12.93 v27.2,12.93
  Bottom 0.152: v27.2,12.93 28.27,12.93 R0-1.1
N$11
  Top 0.152: JTAG.2 58.17,33.43 61.19,30.4 66.52,30.4 68.6,28.33 R7-2.1
N$12  (via drill 0.65)
  other vias: 79.4,17.53
N$13  (via drill 0.65)
  other vias: 80.62,17.53
N$14
  Top 0.152: JTAG.3 60.48,29.44 64.63,29.44 R7-3.1
N$15
  Top 0.152: JTAG.4 53.09,31.06 56.16,27.99 60.74,27.99 R7-4.1
N$16  (via drill 0.65)
  other vias: 80.62,16.33
N$18
  Bottom 0.152: R6-1.1 13.8,4.82 Q1.B
N$19
  Bottom 0.152: R6-2.1 10.81,7.17 11.94,6.04 14.15,6.04 Q2.B
N$20  (via drill 0.65)
  other vias: 79.43,16.36
N$21  (via drill 0.65)
  other vias: 78.23,16.36
N$24  (via drill 0.65)
  other vias: 76.94,16.36
N$26  (via drill 0.65)
  other vias: 76.94,15.19
N$31  (via drill 0.65)
  other vias: 76.94,13.92
N$32  (via drill 0.65)
  other vias: 78.11,13.92
N$34
  Bottom 0.152: R4-5.2 R4-4.1 72.92,9.32 LVL_SHFT_N-MOSFET.1
N$35
  Bottom 0.152: R4-3.2 R4-2.1
N$36  (via drill 0.65)
  other vias: 78.16,15.16
N$37  (via drill 0.65)
  other vias: 79.43,15.16
N$38  (via drill 0.35)
  Top 0.152: v82.45,4.55 82.45,6.2 IC1.35
  Bottom 0.152: R0-2.2 82.43,4.53 v82.45,4.55
N$39  (via drill 0.65)
  other vias: 80.57,15.11
N$40  (via drill 0.35)
  Top 0.152: LED_TX_GRN.1 27.04,18.78 v27.03,18.8
  Bottom 0.152: v27.03,18.8 27.04,18.78 R1-5.1
N$41  (via drill 0.35)
  Top 0.152: v27.18,15.95 28.21,15.95 LED_RX_RED.1
  Bottom 0.152: R1-6.1 28.24,15.95 v27.18,15.95
N$42  (via drill 0.65)
  other vias: 80.62,13.89
N$43  (via drill 0.65)
  other vias: 79.38,13.92
N$44  (via drill 0.7)
  other vias: 40.36,20.83
N$45  (via drill 0.7)
  other vias: 41.86,20.78
N$46  (via drill 0.7)
  other vias: 41.86,19.1
N$47  (via drill 0.7)
  other vias: 41.88,17.37
N$48  (via drill 0.7)
  other vias: 40.41,19.13
N$49  (via drill 0.7)
  other vias: 38.94,19.1
N$50  (via drill 0.7)
  other vias: 38.96,17.37
N$51  (via drill 0.7)
  other vias: 40.44,17.37
RES
  Bottom 0.152: R3-1.2 54.75,15.49 C3-1.1 55.37,16.11 OLED.RES/RST
RSTB  (via drill 0.35)
  Top 0.305: USB_INTERFACE.9 8.27,15.61 v8.26,15.62
  Bottom 0.305: v8.26,15.62 8.98,16.33 R1-3.1
RTS_IN
  Bottom 0.152: Q2.C 14.21,2.95 R6-1.2 12.63,1.8 7.47,1.8 USB_UART_IN.4
RTS_OUT  (via drill 0.35)
  Top 0.152: USB_INTERFACE.24 14.52,14.11 14.83,13.79 14.83,12.37 v14.66,12.37 | USB_UART_OUT.1 4.39,1.57 9.07,1.57 11.35,3.86 v11.35,8.64
  Bottom 0.152: v14.66,12.37 14.66,10.44 12.85,8.64 v11.35,8.64
RX_3V3  (via drill 0.35)
  Top 0.152: UART_3V3.2 42.74,5.12 v45.16,7.54 | v48.87,12.22 48.87,16.33 52.45,19.91 59.61,19.91 v60.02,19.51 | v63.17,16.31 66.52,19.66 71.7,19.66 73.58,21.54 IC1.11
  Bottom 0.152: v45.16,7.54 45.16,8.51 v48.87,12.22 | v60.02,19.51 63.17,16.36 v63.17,16.31
RX_5V_A  (via drill 0.35)
  Top 0.152: v70.97,7.7 70.97,6.28 IC1.26
  Bottom 0.152: LVL_SHFT_N-MOSFET.2 70.95,7.72 v70.97,7.7
RX_5V_B  (via drill 0.35)
  Top 0.152: v59.84,21.11 58.47,22.48 52.32,22.48 42.74,32.07 UART_5V.2
  Bottom 0.152: R4-1.2 75.61,1.88 76.56,2.82 76.56,4.95 75.11,6.4 70.46,6.4 65.05,11.81 65.05,15.9 v59.84,21.11
RX_USB  (via drill 0.35)
  Top 0.152: USB_INTERFACE.26 14.54,15.11 15.62,14.02 15.62,11.94 14.78,11.1 13.34,11.1 v13.31,11.12 | v8.89,10.29 7.85,9.25 4.34,9.25 3.17,8.08 USB_UART_OUT.3
  Bottom 0.152: v13.31,11.12 12.47,10.29 v8.89,10.29
RX_USB_IN
  Top 0.152: USB_UART_IN.2 7.77,7.98 9.51,9.71 17.82,9.71 18.06,9.95 19.48,9.95 19.82,10.3 20.72,10.3 21.18,9.84 57.72,9.84 63.93,3.63 80.31,3.63 81.2,4.52 IC1.34
SCL_3V3  (via drill 0.35)
  Top 0.152: v83.72,7.72 83.74,7.7 IC1.36 83.74,3.96 80.8,1.02 59.94,1.02 I2C_3V3.3
  Bottom 0.152: R0-6.2 83.84,7.85 v83.72,7.72 | OLED.D0/SCL 59.26,19.28 59.26,3.89 I2C_3V3.3
SCL_5V  (via drill 0.35)
  Top 0.152: IC1.31 77.44,6.27 v77.44,7.75 81.92,12.22 v81.92,12.29 | I2C_5V_2.3 74.18,32 I2C_5V_1.3 82.68,32 v83.52,31.17
  Bottom 0.152: R0-4.2 78.26,8.56 v77.44,7.75 | v81.92,12.29 83.54,13.92 83.54,31.14 v83.52,31.17
SDA_3V3  (via drill 0.35)
  Top 0.152: v79.93,7.7 79.93,6.22 IC1.33
  Bottom 0.152: R0-5.2 81.05,8.81 v79.93,7.7 77.7,5.46 77.7,2.34 76.38,1.02 57.4,1.02 I2C_3V3.2 55.63,2.87 58.78,6.02 58.78,17.22 OLED.D1/SDA
SDA_5V  (via drill 0.35)
  Top 0.152: IC1.30 76.12,6.22 v76.12,7.72 74.19,9.65 v74.19,19.66 | 74.18,29.46 I2C_5V_2.2 69.27,34.38 | 74.18,29.46 74.36,29.46 | 74.36,29.46 74.46,29.46 | 74.46,29.46 I2C_5V_1.2 | v74.19,28.96 v74.18,28.97 74.18,29.18 | 74.18,29.18 74.18,29.29 | 74.18,29.29 74.18,29.46 | 74.18,29.29 74.36,29.46 | 74.18,29.18 74.46,29.46
  Bottom 0.152: R0-3.2 76.12,8.22 v76.12,7.72 | v74.19,28.96 v74.19,19.66
SUSPENDB  (via drill 0.35)
  Top 0.305: USB_INTERFACE.11 v8.23,14.61
  Bottom 0.305: v8.23,14.61 9.27,14.61 R1-4.2
TX_3V3  (via drill 0.35)
  Top 0.152: UART_3V3.3 45.28,4.92 v47.98,7.62 | v49.58,12.9 50.04,12.9 54.53,17.4 59.97,17.4 v59.99,17.42 | v62,16.31 66.78,21.08 71.12,21.08 72.31,22.27 IC1.12
  Bottom 0.152: v49.58,12.9 49.58,9.22 v47.98,7.62 | v59.99,17.42 60.88,17.42 v62,16.31
TX_5V_A  (via drill 0.35)
  Top 0.152: IC1.29 v74.85,4.7
  Bottom 0.152: v74.85,4.7 74.93,4.62 R4-1.1 R4-2.2
TX_5V_B  (via drill 0.35)
  Top 0.152: UART_5V.3 45.31,34.25 45.31,32 52.3,25.02 58.32,25.02 59.87,23.47 v59.87,22.4
  Bottom 0.152: R4-5.1 R4-6.1 67.48,14.79 v59.87,22.4
TX_USB  (via drill 0.35)
  Top 0.152: USB_UART_OUT.2 4.32,4.19 8.18,4.19 9.83,5.84 v9.83,8.38 | USB_INTERFACE.25 14.55,14.61 15.27,13.89 15.27,12.09 14.88,11.71 v14.02,11.71
  Bottom 0.152: v14.02,11.71 14.02,10.46 13.26,9.7 10.67,9.7 9.83,8.87 v9.83,8.38
TX_USB_IN  (via drill 0.35)
  Top 0.152: USB_UART_IN.3 8.26,7.32 8.26,7.9 9.76,9.4 17.94,9.4 18.19,9.65 19.6,9.65 19.95,9.99 20.59,9.99 21.05,9.54 56.96,9.54 63.5,3 v79.43,3
  Bottom 0.152: v79.43,3 R0-2.1
V_BAT  (via drill 0.7)
  Top 0.152: 19.86,20.16 VREG_5V.3
  Top 0.66: BAT.1 3.47,32.08 POL_PROTEC.1 8.89,30.5 10.44,28.96 14.12,28.96 | 19.86,20.16 17.23,20.16 C5-2.2 15.63,19.95 14.88,20.7 14.88,28.19 | 15.65,28.96 18.69,28.96 19.74,27.91 29.87,27.91 31.65,26.14 v31.65,14.5 | 15.65,28.96 14.88,28.19 | 14.88,28.19 14.12,28.96 | 14.12,28.96 15.65,28.96
  Bottom 0.66: MTR_DRVR.9 37.54,14.26 | 37.54,14.26 C2-2.2 | v31.65,14.5 37.29,14.5 37.54,14.26
VBUS_INT  (via drill 0.7)
  Top 0.254: 9.09,16.56 9.17,16.48
  Top 0.305: USB_INTERFACE.8 9.33,16.32 9.17,16.48
  Top 0.66: 9.09,16.56 8.81,16.84 8.81,25.12 10.21,26.52 v10.21,26.94
  Bottom 0.66: R1-1.2 R1-2.2 16.16,26.79 14.88,28.07 11.76,28.07 10.64,26.94 v10.21,26.94
VBUS_USB  (via drill 0.7)  (1 unrouted)
  Top 0.254: USB_PORT.B9 USB_PORT.A4 | USB_PORT.B4 USB_PORT.A9
  Top 0.66: FUSE.2 v12.98,25.15
  Bottom 0.152: 13.31,25.15 13.48,25.15
  Bottom 0.254: USB_PORT.B9 7.44,21.18
  Bottom 0.305: 11.54,24.53 10.52,25.55 9.14,25.55 8.28,24.69 8.28,21.58 7.87,21.18 7.44,21.18 USB_PORT.A4
  Bottom 0.66: R1-1.1 13.48,25.15 | 13.31,25.15 v12.98,25.15 12.65,25.15 TVS_DIODE_ESD_P.2 11.54,24.53